# EAGLE board Chicken farmhouse electrical design (EAGLE 9.7.0)

Size 119.42 x 110.74 mm. Coordinates in mm from the lower left corner, seen from the top.
Outline: 0,0 119.42,0 119.42,110.74 0,110.74 0,0
Copper layers (1*16): Top 0.035mm / dielectric 1.5mm / Bottom 0.035mm
Design rules "default": minimum track width 6mil, minimum drill 0.35mm, track to track 6mil, track to pad 6mil, pad to pad 6mil, via to via 6mil, smd to smd 6mil, copper to edge 40mil, drill to drill 6mil, minimum pad ring 10mil, minimum via ring 8mil, stop-mask expansion 4mil, vias tented up to drill 0mil, thermal gap 10mil

## Footprints (pad centres in the part's own frame; a part is rotated, then mirrored left to right if it is on the bottom)
BATTERY-GENERIC = drill 1.118 pad 3.15 octagon: + 2.54,0; - -2.54,0
LEDRD254W60D565H860B = drill 0.981 pad 1.581: 1 -1.27,0; 2 1.27,0
PIEZO = drill 1 pad 1.6: 1 -3.5,0; 2 3.5,0
GL5528 = drill 0.8 pad 1.4: 1 -1.702,0; 2 1.702,0
RESAD1016W63L850D250B = drill 0.83 pad 1.43: 1 -5.08,0; 2 5.08,0
ARDUINO-UNO-R3-SHIELD = drill 1.016 pad 1.88: 3.3V 24.13,-2.54; 5V 24.13,0; A0 24.13,12.7; A1 24.13,15.24; A2 24.13,17.78; A3 24.13,20.32; A4 24.13,22.86; A5 24.13,25.4; AREF -24.13,-13.97; D2 -24.13,20.32; D3 -24.13,17.78; D4 -24.13,15.24; D5 -24.13,12.7; D6 -24.13,10.16; D7 -24.13,7.62; D8 -24.13,3.81; D9 -24.13,1.27; D10 -24.13,-1.27; D11 -24.13,-3.81; D12 -24.13,-6.35; D13 -24.13,-8.89; GND@0 24.13,2.54; GND@1 24.13,5.08; GND@2 -24.13,-11.43; IOREF 24.13,-7.62; NC 24.13,-10.16; RES 24.13,-5.08; RX -24.13,25.4; SCL -24.13,-19.05; SDA -24.13,-16.51; TX -24.13,22.86; VIN 24.13,7.62

## Placement (x,y rotation side)
BAT1  9V  [BATTERY-GENERIC]  111.17,77.91 270 top
D1  RED  [LEDRD254W60D565H860B]  6.06,74.47 180 top
D2  RED  [LEDRD254W60D565H860B]  23.83,72.82 180 top
PIEZO1  PIEZO  [PIEZO]  15.52,97.16 0 top
R3  PHOTOCELL_GL5528  [GL5528]  72.52,85.21 0 top
R4  10k  [RESAD1016W63L850D250B]  92.06,80.54 90 top
R5  220k  [RESAD1016W63L850D250B]  7.12,66.54 90 top
R6  220k  [RESAD1016W63L850D250B]  25.1,67.74 90 top
U1  ARDUINO-UNO-R3-SHIELD  [ARDUINO-UNO-R3-SHIELD]  71.07,29.84 270 top

## Library data of the parts
BAT1 PIEZO1 R3-R6 U1 = Tinkercad
D1 D2 = Tinkercad; CATEGORY: Opto-Electronic; SUB-CATEGORY: LED; VALUE: LED_RED

## Nets
BAT1+: BAT1.+ R3.1 U1.5V
BAT1-: BAT1.- D1.2 D2.2 PIEZO1.2 R4.1 U1.GND@0 U1.GND@1 U1.GND@2
D1_A: D1.1 R5.2
D2_A: D2.1 R6.2
U1_A0: R3.2 R4.2 U1.A0
U1_D6: R5.1 U1.D6
U1_D7: R6.1 U1.D7
U1_D8: PIEZO1.1 U1.D8

## Tracks (layer width: path | path; a pad name or v marks a point on that pad's centre or on a via)
BAT1+  (2 unrouted)
BAT1-  (7 unrouted)
D1_A  (1 unrouted)
D2_A  (1 unrouted)
U1_A0  (2 unrouted)
U1_D6  (1 unrouted)
U1_D7  (1 unrouted)
U1_D8  (1 unrouted)